# Altium PCB pay-led-pcb.PcbDoc
Units mm, origin at the board's own origin, x right, y up, seen from the top; angles counter-clockwise.
Board outline 128 x 17 mm, 4 copper layers (Top copper, GND, VCC, Bottom copper), stack 0.844 mm thick; 65 components, 63 nets, 221 pads, 139 vias.
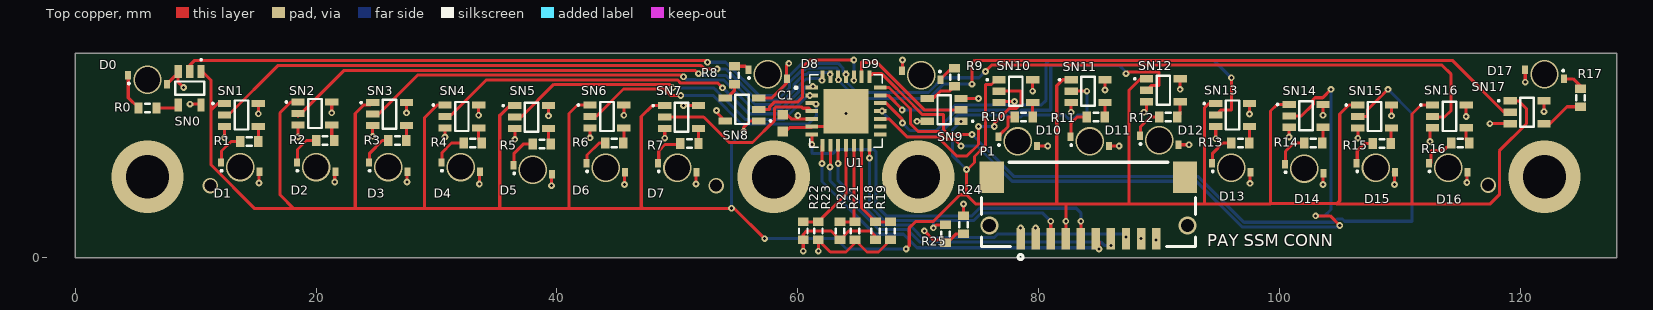
[diagram p0: Top copper view]
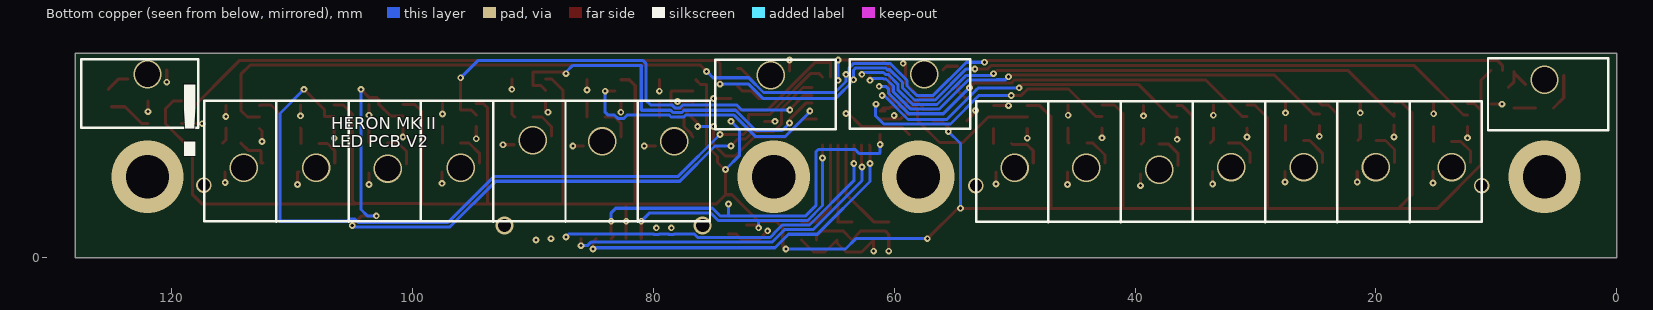
[diagram p1: Bottom copper view, seen from below]
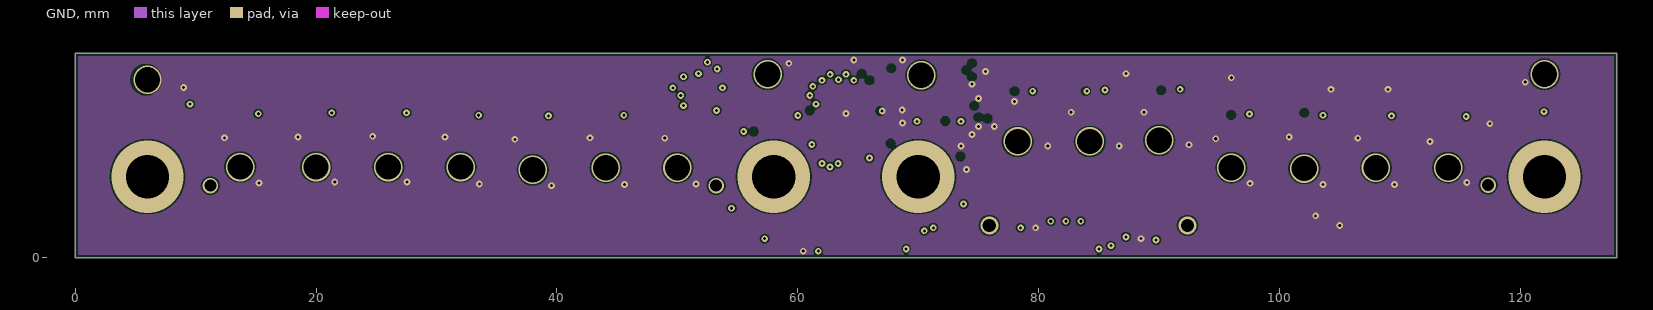
[diagram p2: GND]
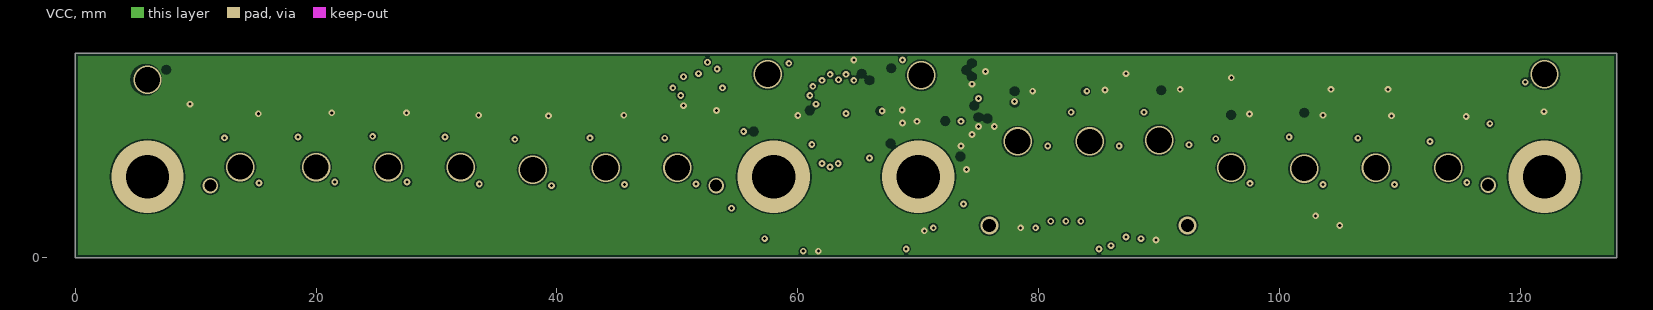
[diagram p3: VCC]

## Layer stack, top to bottom
Top Solder: solder mask 0.0102, Solder Resist, Dk 3.5
Top copper: signal copper 0.0356
Dielectric 1: core 0.32, FR-4, Dk 4.8
GND: signal copper 0.036
Dielectric 3: prepreg 0.127, Dk 4.2
VCC: signal copper 0.036
Dielectric 4: core 0.254, Dk 4.2
Bottom copper: signal copper 0.0356
Bottom Solder: solder mask 0.0102, Solder Resist, Dk 3.5

## Board outline
0,17 128,17 128,0 0,0

## Design rules (kind name [scope] priority, off if disabled: settings)
AssemblyTestPointUsage [All] p1 off:
AssemblyTestpoint [All] p1 off: testpointundercomponent=TRUE minsize=1.016 maxsize=2.54 preferedsize=1.524 minholesize=0 maxholesize=1.016 preferedholesize=0.813 testpointgrid=0.025 usegrid=TRUE gridtolerance=0 allowsidetop=TRUE allowsidebottom=TRUE
BoardOutlineClearance [OnLayer('VCC') or OnLayer('GND')] p1: gap=0.381 ignorepadtopadclearanceinfootprint=FALSE // Inner layer clearance
BoardOutlineClearance BoardOutlineClearance_1 [All] p2: gap=0.254 ignorepadtopadclearanceinfootprint=FALSE // top and bottom layers
Clearance [All] p1: gap=0.127 ignorepadtopadclearanceinfootprint=FALSE except(0: Arc-Hole Track-Hole SMDPad-Hole THPad-Hole Via-Hole Fill-Hole Poly-Hole Region-Hole Text-Hole)
FabricationTestPointUsage [All] p1 off: valid=0 allowmultiple=FALSE
FabricationTestpoint [All] p1 off: side=3 testpointundercomponent=FALSE minsize=1.016 maxsize=2.54 preferedsize=1.524 minholesize=0 maxholesize=1.016 preferedholesize=0.813 testpointgrid=0.025 allowsidetop=TRUE allowsidebottom=TRUE usegrid=TRUE gridtolerance=0
HoleSize [All] p1: absolutevalues=TRUE maxlimit=6.35 minlimit=0.203 maxpercent=80.000 minpercent=20.000
MinimumAnnularRing [All] p1: minimumring=0.127
MinimumSolderMaskSliver [All] p1: minsoldermaskwidth=0.102
PlaneConnect [All] p1: planeconnectstyle=Direct reliefexpansion=0.508 reliefentries=4 reliefconductorwidth=0.254 reliefairgap=0.254
PolygonConnect [All] p1: connectstyle=Direct reliefconductorwidth=0.254 reliefentries=4 polygonreliefangle="90 Angle" airgapwidth=0.254
RoomDefinition pay-led-pcb [InComponentClass('pay-led-pcb')] p1: confinementstyle=ConfineIn formatcopy=TRUE lockcomponents=FALSE outline 129,2 135.5,2 135.5,9.5 129,9.5
RoutingVias [All] p1: holewidth=0.254 width=0.559 viastyle="Through Hole" minholewidth=0.254 minwidth=0.559 maxholewidth=12.7 maxwidth=12.7
SilkToSilkClearance [All] p1: silktosilkclearance=0
SilkToSolderMaskClearance [IsPad] p1: minsilkscreentomaskgap=0.076 clearancetoexposedcopper=TRUE
SolderMaskExpansion [All] p1: expansion=0.102
Width [All] p1: maxlimit=254 minlimit=0.152 preferedwidth=0.254
21 further rules are at their usual default settings.

## Components (designator, comment, footprint, x,y, rotation, side; value= is the part's Value field where it differs from the comment)
C1 "0.1uF" 1608[0603] 58.75,11.2 r90 top
D0 "LED0" "LB P4SG" 6,14.792 r0 bottom
D1 "LED0" "LB P4SG" 13.7,7.55 r0 bottom
D2 "LED0" "LB P4SG" 20,7.55 r0 bottom
D3 "LED0" "LB P4SG" 26,7.55 r0 bottom
D4 "LED0" "LB P4SG" 32,7.55 r0 bottom
D5 "LED0" "LB P4SG" 38,7.325 r0 bottom
D6 "LED0" "LB P4SG" 44.05,7.5 r0 bottom
D7 "LED0" "LB P4SG" 50,7.5 r0 bottom
D8 "LED0" "LB P4SG" 57.5,15.25 r0 bottom
D9 "LED0" "LB P4SG" 70.25,15.167 r180 bottom
D10 "LED0" "LB P4SG" 78.25,9.675 r0 bottom
D11 "LED0" "LB P4SG" 84.25,9.675 r0 bottom
D12 "LED0" "LB P4SG" 90,9.775 r0 bottom
D13 "LED0" "LB P4SG" 96,7.5 r0 bottom
D14 "LED0" "LB P4SG" 102.05,7.425 r0 bottom
D15 "LED0" "LB P4SG" 108,7.5 r0 bottom
D16 "LED0" "LB P4SG" 114,7.5 r0 bottom
D17 "LED0" "LB P4SG" 122,15.25 r180 bottom
P1 "10 pin DF14" DF14-10P-1.25H(55) 84.125,1.6 r0 top locked
R0 "330" J1-0603 6,12.45 r0 top
R1 "330" J1-0603 14.45,9.675 r0 top
R2 "330" J1-0603 20.75,9.75 r0 top
R3 "330" J1-0603 26.75,9.75 r0 top
R4 "330" J1-0603 33,9.55 r0 top
R5 "330" J1-0603 38.75,9.45 r0 top
R6 "330" J1-0603 44.75,9.55 r0 top
R7 "330" J1-0603 51,9.5 r0 top
R8 "330" J1-0603 54.75,15.167 r270 top
R9 "330" J1-0603 73,15 r270 top
R10 "330" J1-0603 78.75,11.7 r0 top
R11 "330" J1-0603 84.75,11.7 r0 top
R12 "330" J1-0603 90.75,11.7 r0 top
R13 "330" J1-0603 96.75,9.55 r0 top
R14 "330" J1-0603 102.8,9.55 r0 top
R15 "330" J1-0603 108.5,9.5 r0 top
R16 "330" J1-0603 115,9.55 r0 top
R17 "330" J1-0603 125,13.306 r270 top
R18 "1K" J1-0603 66.45,2.25 r90 top
R19 "1K" J1-0603 67.7,2.25 r90 top
R20 "1K" J1-0603 63.5,2.25 r90 top
R21 "1K" J1-0603 64.75,2.25 r90 top
R22 "1K" J1-0603 60.45,2.25 r90 top
R23 "1K" J1-0603 61.7,2.25 r90 top
R24 "10K" J1-0603 73.75,2.75 r90 top
R25 "10K" J1-0603 72.25,2 r90 top
SN0 "SN74AHC1G08" SOT-23-5_95P290X160-5N 10.45,15.492 r270 top
SN1 "SN74AHC1G08" SOT-23-5_95P290X160-5N 12.4,12.825 r0 top
SN2 "SN74AHC1G08" SOT-23-5_95P290X160-5N 18.5,12.95 r0 top
SN3 "SN74AHC1G08" SOT-23-5_95P290X160-5N 24.7,12.9 r0 top
SN4 "SN74AHC1G08" SOT-23-5_95P290X160-5N 30.7,12.7 r0 top
SN5 "SN74AHC1G08" SOT-23-5_95P290X160-5N 36.5,12.65 r0 top
SN6 "SN74AHC1G08" SOT-23-5_95P290X160-5N 42.75,12.7 r0 top
SN7 "SN74AHC1G08" SOT-23-5_95P290X160-5N 48.95,12.65 r0 top
SN8 "SN74AHC1G08" SOT-23-5_95P290X160-5N 56.764,11.38 r180 top
SN9 "SN74AHC1G08" SOT-23-5_95P290X160-5N 73.55,11.35 r180 top
SN10 "SN74AHC1G08" SOT-23-5_95P290X160-5N 76.7,14.8 r0 top
SN11 "SN74AHC1G08" SOT-23-5_95P290X160-5N 82.7,14.8 r0 top
SN12 "SN74AHC1G08" SOT-23-5_95P290X160-5N 88.95,14.875 r0 top
SN13 "SN74AHC1G08" SOT-23-5_95P290X160-5N 94.7,12.825 r0 top
SN14 "SN74AHC1G08" SOT-23-5_95P290X160-5N 100.8,12.75 r0 top
SN15 "SN74AHC1G08" SOT-23-5_95P290X160-5N 106.5,12.7 r0 top
SN16 "SN74AHC1G08" SOT-23-5_95P290X160-5N 112.7,12.706 r0 top
SN17 "SN74AHC1G08" SOT-23-5_95P290X160-5N 119.162,13.052 r0 top
U1 "MCP23S17" QFN65P600X600X100-29N 64,12.2 r0 top

## Footprints (in the part's own frame and the unit in brackets; to place one, negate y for a bottom-side part, rotate by r counter-clockwise, add the part's x,y. Pads: shape width x height; smd on the part's side, far side on the other; paste and mask are expansions set on the pad)
1608[0603] [mm] "Chip Capacitor, Body 1.6x0.8mm, IPC High Density"
  rect 0.8x0.9 smd: 1(-0.7,0) 2(0.7,0)
  body extent -0.87,-0.48 0.87,0.48, height 1.3
DF14-10P-1.25H(55) [mm]
  rect 0.7x1.8 smd: 1(-5.625,0) 2(-4.375,0) 3(-3.125,0) 4(-1.875,0) 5(-0.625,0) 6(0.625,0) 7(1.875,0) 8(3.125,0) 9(4.375,0) 10(5.625,0)
  rect 2x2.6 smd: ""(-8.025,5.1) ""(8.025,5.1)
  silkscreen extent -8.89,-1.73 8.89,6.35, body extent -8.73,-0.5 8.72,6.2, height 2.49
J1-0603 [mm] "Chip Resistor, Body 1.6x0.8mm, IPC High Density"
  rect 0.7x0.9 smd: 1(-0.75,0) 2(0.75,0)
  silkscreen extent -0.2,-0.35 0.2,0.35, body extent -0.85,-0.48 0.85,0.48, height 0.9
"LB P4SG" [mm] "Footprint for a reverse-mount Osram LED"
  rect 0.5x0.7 smd far side mask+0.102: 1(-1.6,-0.375) 2(1.6,0.375)
QFN65P600X600X100-29N [mm]
  rect 1.04x0.33 smd: 1(-2.835,1.95) 2(-2.835,1.3) 3(-2.835,0.65) 4(-2.835,0) 5(-2.835,-0.65) 6(-2.835,-1.3) 7(-2.835,-1.95) 15(2.835,-1.95) 16(2.835,-1.3) 17(2.835,-0.65) 18(2.835,0) 19(2.835,0.65) 20(2.835,1.3) 21(2.835,1.95)
  rect 0.33x1.04 smd: 8(-1.95,-2.835) 9(-1.3,-2.835) 10(-0.65,-2.835) 11(0,-2.835) 12(0.65,-2.835) 13(1.3,-2.835) 14(1.95,-2.835) 22(1.95,2.835) 23(1.3,2.835) 24(0.65,2.835) 25(0,2.835) 26(-0.65,2.835) 27(-1.3,2.835) 28(-1.95,2.835)
  rect 3.7x3.7 smd: 29(0,0)
  silkscreen extent -4.24,-3 3,3
SOT-23-5_95P290X160-5N [mm]
  rect 1.1x0.6 smd: 1(0,0) 2(0,-0.95) 3(0,-1.9) 4(2.8,-1.9) 5(2.8,0)
  silkscreen extent -0.99,-2.16 1.96,0.25

## Part data
C1: library part Cap, "Capacitor", Supplier Part Number 1=311-1341-1-ND, LatestRevisionDate=17-Jul-2002, LatestRevisionNote="Re-released for DXP Platform.", PackageDescription="Radial Cap, Thru-Hole; 2 Leads; 0.3 in Pin Spacing", PackageReference=RAD-0.3, Published=8-Jun-2000, Publisher="Altium Limited", Supplier=Digi-Key
D0 D1 D2 D3 D4 D5 D6 D7 D8 D9 D10 D11 D12 D13 D14 D15 D16 D17: "Typical INFRARED GaAs LED", Supplier Part Number 1=475-1316-1-ND, LatestRevisionDate=08-Jul-2005, LatestRevisionNote="Mech Layer 1 removed.", PackageDescription="LED; 2 Leads", PackageReference=LED-0, Published=8-Jun-2000, Publisher="Altium Limited", Supplier=Digi-Key
P1: library part "Header 10", "Header, 10-Pin", Supplier Part Number 1=H10329CT-ND, LatestRevisionDate=17-Jul-2002, LatestRevisionNote="Re-released for DXP Platform.", Publisher="Altium Limited", Supplier=Digi-Key
R0 R1 R2 R3 R4 R5 R6 R7 R8 R9 R10 R11 R12 R13 R14 R15 R16 R17: library part Res2, "Resistor", Supplier Part Number 1=1276-4604-1-ND, LatestRevisionDate=17-Jul-2002, LatestRevisionNote="Re-released for DXP Platform.", PackageDescription="Axial Device, Thru-Hole; 2 Leads; 0.4 in Pin Spacing", PackageReference=AXIAL-0.4, Published=8-Jun-2000, Publisher="Altium Limited", Supplier=Digi-Key
R18 R19 R20 R21 R22 R23: library part Res2, "Resistor", Supplier Part Number 1=RNCP0603FTD1K00CT-ND, LatestRevisionDate=17-Jul-2002, LatestRevisionNote="Re-released for DXP Platform.", PackageDescription="Axial Device, Thru-Hole; 2 Leads; 0.4 in Pin Spacing", PackageReference=AXIAL-0.4, Published=8-Jun-2000, Publisher="Altium Limited", Supplier=Digi-Key
R24 R25: library part Res2, "Resistor", Supplier Part Number 1=RMCF0603JG10K0CT-ND, LatestRevisionDate=17-Jul-2002, LatestRevisionNote="Re-released for DXP Platform.", PackageDescription="Axial Device, Thru-Hole; 2 Leads; 0.4 in Pin Spacing", PackageReference=AXIAL-0.4, Published=8-Jun-2000, Publisher="Altium Limited", Supplier=Digi-Key
SN0 SN1 SN2 SN3 SN4 SN5 SN6 SN7 SN8 SN9 SN10 SN11 SN12 SN13 SN14 SN15 SN16 SN17: Supplier Part Number 1=296-23875-1-ND, Supplier=Digi-Key
U1: "16-bit I/O expander.", Supplier Part Number 1=MCP23S17T-E/MLCT-ND, Supplier=Digi-Key

## Via types
v1: diameter 0.559, hole 0.254, Top copper to Bottom copper, 111 vias
v2: diameter 2.362, hole 2.1, Top copper to Bottom copper, 18 vias
v3: diameter 6, hole 3.6, Top copper to Bottom copper, 4 vias
v4: diameter 1.3, hole 1, Top copper to Bottom copper, 3 vias
v5: diameter 1.5, hole 1.1, Top copper to Bottom copper, 2 vias
v6: diameter 0.559, hole 0.254, Top copper to GND, 1 vias

## Nets (pads, with @x,y where several pads share a name; then routed paths per layer and width w, separated by ;. In a path a pad name is that pad's centre, name@x,y a point inside that pad or via, vN(x,y) a via of type N, cw(c..) or ccw(c..) an arc to the next point about the centre after c; other vN are vias at no path point)
3V3: C1.2 P1.1 P1.10 R19.1 R21.1 R23.1 R24.1 R25.1 SN0.5 SN1.5 SN2.5 SN3.5 SN4.5 SN5.5 SN6.5 SN7.5 SN8.5 SN9.5 SN10.5 SN11.5 SN12.5 SN13.5 SN14.5 SN15.5 SN16.5 SN17.5 U1.5 | length 31.9
  Top copper w0.254: v1(9.525,12.775) SN0.5@10.45,12.775 ; v1(15.2,11.975) SN1.5 ; v1(21.3,12.05) SN2.5 ; v1(27.5,12.05) SN3.5 ; v1(33.5,11.85) SN4.5 ; v1(39.3,11.8) SN5.5 ; v1(45.55,11.85) SN6.5 ; v1(50.5,12.65) SN7.5 ; v1(53.25,12.25) 53.25,12.094 SN8.5 ; C1.2 59.1,11.9 59.45,11.55 v1@60,11.55 ; v1(60,11.829) v1@60,11.55 ; U1.5 v1@60,11.55 ; v1(61.7,0.562) R23.1 62.7,0.5 64,0.5 64.75,1.25 R21.1 65.75,0.5 66.7,0.5 R19.1 ; v1(69.9,11.35) SN9.5 ; v1(70.5,2.25) 71.25,1.5 72.65,1.5 73.15,2 R24.1 ; v1(79.5,13.85) SN10.5 ; v1(85.5,13.942) SN11.5 ; v1(89.75,1.5) P1.10 ; v1(91.75,14) SN12.5 ; v1(97.5,11.95) SN13.5 ; v1(103.6,11.85) SN14.5 ; v1(109.3,11.8) SN15.5 ; v1(115.5,11.75) SN16.5@115.5,12.65 ; v1(121.962,12.153) SN17.5
  other v1: 78.5,2.5
CH0: SN0.2 SN16.2 U1.25 | length 115.5
  Top copper w0.254: SN0.2@9.5,15.575 9.5,16 9.875,16.375 9.869,16.381 52.369,16.381 v1(52.5,16.25) ; v1(75.575,15.492) 75.575,15.502 76.099,16.026 113.474,16.026 114.25,15.25 114.25,12.25 113.7,11.7 SN16.2@112.7,11.7
  Bottom copper w0.254: v1(52.5,16.25) 54.002,16.25 56.752,13.5 58.15,13.5 58.935,14.285 58.935,14.746 60.353,16.164 63.349,16.164 63.756,15.758 63.756,15.494 v1(64,15.25) 64,14.646 64.913,13.732 70.844,13.732 72.076,14.964 75.047,14.964 v1(75.575,15.492)
CH1: SN1.2 SN17.2 U1.26 | length 116.6
  Top copper w0.254: SN1.2 12.725,11.875 16.85,16 51.931,16 52.23,15.701 v1(53.299,15.701) ; U1.26 63.375,15.06 v1(63.375,14.8) ; v1(74.457,14.431) 74.457,16.164 74.7,16.407 114.343,16.407 SN17.2@118.75,12
  Bottom copper w0.254: v1(53.299,15.701) 54.012,15.701 56.594,13.119 58.308,13.119 59.316,14.127 59.316,14.589 60.358,15.631 60.574,15.631 60.726,15.783 63.192,15.783 63.375,15.6 v1(63.375,14.8) 63.375,14.732 64.857,13.25 70.901,13.25 72.082,14.431 v1(74.457,14.431)
CH2: SN2.2 U1.27 | length 48.9
  Top copper w0.254: SN2.2 18.5,11.741 19.304,12.545 19.304,12.554 22.333,15.583 51.467,15.583 v1(51.75,15.3) ; v1(62.689,15.25) 62.689,15.024 U1.27
  Bottom copper w0.254: v1(51.75,15.3) 51.883,15.167 54.007,15.167 56.436,12.738 58.466,12.738 59.697,13.969 59.697,14.431 60.516,15.25 60.732,15.25 60.884,15.402 62.537,15.402 v1(62.689,15.25)
CH3: SN3.2 U1.28 | length 41.6
  Top copper w0.254: SN3.2 25.2,11.95 28.425,15.175 50.375,15.175 v1(50.5,15.05) ; v1(62,14.75) 62,15.085 U1.28
  Bottom copper w0.254: v1(50.5,15.05) 50.75,14.8 51.496,14.8 51.529,14.767 53.869,14.767 56.278,12.357 58.623,12.357 60.078,13.812 60.078,14.273 60.674,14.869 60.89,14.869 60.923,14.902 61.848,14.902 v1(62,14.75)
CH4: SN4.2 U1.1 | length 34.1
  Top copper w0.254: SN4.2 31.1,11.75 34.144,14.794 50.002,14.794 50.279,14.517 53.364,14.517 v1(53.75,14.131)
  Bottom copper w0.254: v1(53.75,14.131) 53.771,14.131 55.927,11.975 58.419,11.975 58.42,11.976 58.781,11.976 60.459,13.654 60.459,14.015 60.694,14.25 v1(61.25,14.25)
CH5: SN5.2 U1.2 | length 27.8
  Top copper w0.254: SN5.2 37.025,11.7 39.738,14.413 49.337,14.413 v1(49.619,14.131) ; v1(61,13.5) U1.2
  Bottom copper w0.254: v1(49.619,14.131) 53,14.131 53.217,13.914 53.217,13.91 55.627,11.5 58.844,11.5 60.811,13.467 60.967,13.467 v1(61,13.5)
CH6: SN6.2 U1.3 | length 22.2
  Top copper w0.254: SN6.2 43.25,11.75 45.532,14.032 48.918,14.032 49.45,13.5 v1(50.279,13.5)
  Bottom copper w0.254: v1(50.279,13.5) 52.949,13.5 55.33,11.119 60.869,11.119 61.533,11.784 61.533,12.742 v1(61.5,12.775)
CH7: SN7.2 U1.4 | length 15.5
  Top copper w0.254: SN7.2 52.181,11.7 54.295,9.586 56.234,9.586 58.046,11.398 58.046,12.405 58.195,12.554 60.294,12.554 60.417,12.431 60.934,12.431 U1.4 U1.4@60.771,12.2
CH8: SN8.2 U1.24 | length 13.2
  Top copper w0.254: SN8.2 57.665,12.33 57.665,12.563 58.037,12.935 59.979,12.935 60.391,13.347 60.391,15.837 61,16.446 v1(64.65,16.446) ; v1(64.65,14.75) U1.24
  Bottom copper w0.254: v1(64.65,14.75) v1(64.65,16.446)
CH9: SN9.2 U1.23 | length 11.1
  Top copper w0.254: U1.23 65.3,16.25 66.55,16.25 69.946,12.854 69.946,12.845 70.491,12.3 SN9.2
CH10: SN10.2 U1.17 | length 19.1
  Top copper w0.254: U1.17@66.45,11.55 U1.17 67.609,11.55 67.609,11.52 69.079,10.05 71.607,10.05 73.179,8.478 74.053,8.478 75,9.425 v1(75,10.908) ; v1(76.316,10.908) 76.316,11.175 77.545,12.404 78.158,12.404 78.533,12.779 78.533,13.817 78.5,13.85 SN10.2
  Bottom copper w0.254: v1(75,10.908) v1(76.316,10.908)
CH11: SN11.2 U1.18 | length 21.9
  Top copper w0.254: U1.18 v1(67,12.2) ; SN11.2@83.2,13.85 v1(84,13.85)
  Bottom copper w0.254: v1(67,12.2) 67,12.129 69.029,10.1 71.546,10.1 73.329,11.883 77.285,11.883 77.463,11.705 78.537,11.705 78.715,11.883 82.167,11.883 82.167,11.879 82.479,11.567 82.921,11.567 83.233,11.879 83.233,11.883 83.783,11.883 84,12.1 v1(84,13.85)
CH12: SN12.2 U1.19 | length 31.6
  Top copper w0.254: U1.19 67.346,12.85 68.667,11.529 68.667,11.217 v1(68.683,11.2) ; v1(87.25,15.3) 87.379,15.429 90,15.429 90,14.321 89.346,14.321 SN12.2
  Bottom copper w0.254: v1(68.683,11.2) 69.299,10.584 71.491,10.584 73.171,12.264 77.442,12.264 77.621,12.086 78.379,12.086 78.558,12.264 80.981,12.264 81,12.283 81,16 86.685,16 87.25,15.435 v1(87.25,15.3)
CH13: SN13.2 U1.20 | length 38.1
  Top copper w0.254: U1.20 67.497,13.5 68.667,12.33 v1(68.667,12.283) ; SN13.2 95.096,12.271 96,12.271 v1(96,14.964)
  Bottom copper w0.254: v1(68.667,12.283) 72.651,12.283 73.085,12.717 77.529,12.717 77.779,12.467 78.221,12.467 78.471,12.717 80.233,12.717 80.619,13.102 80.619,16.158 80.842,16.381 94.569,16.381 95.986,14.964 v1(96,14.964)
CH14: SN14.2 U1.21 | length 62.3
  Top copper w0.254: U1.21 67.572,14.15 69.184,12.538 69.184,12.529 69.367,12.347 69.367,11.129 69.996,10.5 71.696,10.5 72.196,10 72.219,10 72.346,9.873 72.977,9.873 v1(73.55,9.3) v1@73.65,9.4 ; SN14.2 101.83,11.8 102.796,12.766 102.796,13.155 102.945,13.304 103.581,13.304 v1(104.277,14) ; v1(103,3.5) 104.2,3.5 v1(105,2.7)
  Bottom copper w0.254: v1(73.55,9.3) 74.872,9.3 77.803,6.369 93.092,6.369 96.876,2.586 104.886,2.586 v1(105,2.7) ; v1(103,3.5) 103.75,3.5 104.277,4.027 v1(104.277,14)
CH15: SN15.2 U1.22 | length 66.7
  Top copper w0.254: U1.22 66.215,15.3 66.961,15.3 69.565,12.696 69.565,12.687 70.348,11.904 72.096,11.904 72.096,10.662 72.504,10.254 v1(74.457,10.254) ; SN15.2 107.304,11.75 107.304,12.304 v1(109,14)
  Bottom copper w0.254: v1(74.457,10.254) 77.961,6.75 93.25,6.75 97.033,2.967 104.512,2.967 104.779,3.233 105.221,3.233 105.404,3.05 111,3.05 111,12 v1(109,14)
GND: C1.1 D0.2 D1.2 D2.2 D3.2 D4.2 D5.2 D6.2 D7.2 D8.2 D9.2 D10.2 D11.2 D12.2 D13.2 D14.2 D15.2 D16.2 D17.2 P1.2 P1.9 R18.1 R20.1 R22.1 SN0.3 SN1.3 SN2.3 SN3.3 SN4.3 SN5.3 SN6.3 SN7.3 SN8.3 SN9.3 SN10.3 SN11.3 SN12.3 SN13.3 SN14.3 SN15.3 SN16.3 SN17.3 U1.6 U1.29 | length 54.3
  Top copper w0.254: D0.2 SN0.3@8.55,15.367 ; D0.2@7.6,14.425 8,14.825 ; SN0.3 SN0.3@8.55,15.367 ; v6(9,14.15) 8.55,14.6 SN0.3@8.55,15.367 ; v1(12.4,9.975) SN1.3 ; v1(15.25,6.225) D1.2@15.25,7.175 ; v1(18.5,10.05) SN2.3 ; v1(21.55,6.3) D2.2@21.55,7.175 ; v1(24.7,10.1) SN3.3 ; v1(27.55,6.3) D3.2@27.55,7.175 ; v1(30.7,10.05) SN4.3 ; v1(33.55,6.15) D4.2@33.55,7.175 ; v1(36.5,9.85) SN5.3 ; v1(39.55,6) D5.2@39.55,6.95 ; v1(42.75,9.975) SN6.3 ; v1(45.6,6.1) D6.2@45.6,7.125 ; v1(48.95,9.95) SN7.3 ; v1(51.55,6.15) D7.2@51.55,7.125 ; SN8.3 57.841,13.28 59.05,14.489 59.05,15.964 v1(59.25,16.164) ; C1.1@58.75,10.25 59.35,10.85 61.115,10.85 U1.6 62.7,10.9 U1.29 v1(64,12) ; v1(60.45,0.561) R22.1 60.45,1.95 60.75,2.25 62.75,2.25 R20.1 64.25,2.25 66,2.25 66.45,1.8 R18.1 ; D9.2@68.7,15.542 v1(68.7,16.446) ; SN9.3 v1(75,13.25) ; SN10.3 76.8,13 v1(78,13) ; D10.2@79.8,9.3 D10.2 v1(80.75,9.3) ; v1(82.7,12.1) SN11.3 ; D11.2@85.8,9.3 D11.2 v1(86.685,9.3) ; v1(88.75,12.1) 88.95,12.3 SN12.3 ; D12.2@91.55,9.4 D12.2 v1(92.485,9.4) ; v1(94.7,9.9) SN13.3 ; v1(97.55,6.2) D13.2@97.55,7.125 ; v1(100.8,10.05) SN14.3 ; v1(103.6,6.1) D14.2@103.6,7.05 ; v1(106.5,9.95) SN15.3 ; D15.2@109.435,7.125 109.55,7.125 v1(109.55,6.1) ; v1(112.5,9.675) 112.5,10.55 SN16.3@112.7,10.75 ; v1(115.55,6.275) D16.2@115.55,7.125 ; v1(117.462,11.152) SN17.3 ; v1(120.4,14.6) D17.2
  other v1: 88.5,1.6 79.75,2.5
LED_CLK: P1.4 SN0.1 SN1.1 SN2.1 SN3.1 SN4.1 SN5.1 SN6.1 SN7.1 SN8.1 SN9.1 SN10.1 SN11.1 SN12.1 SN13.1 SN14.1 SN15.1 SN16.1 SN17.1 | length 278.1
  Top copper w0.254: SN0.1@10.45,15.575 11.288,14.737 11.288,12.287 ; SN1.1 11.825,12.825 11.288,12.287 ; SN2.1 17.9,12.95 17,12.05 17,5.25 18.154,4.096 ; 23.25,4.25 23.25,12 23.95,12.7 24.5,12.7 SN3.1 ; SN4.1 30.05,12.7 29,11.65 29,4.096 ; SN5.1 36.092,12.65 35.292,11.85 35.25,11.85 35.25,4.096 ; SN6.1 41.7,12.7 41,12 41,4.096 ; SN7.1 47.9,12.65 47,11.75 47,4.25 ; v1@54.5,4.096 47.154,4.096 47,4.25 ; v1@54.742,4.096 v1@57.244,1.594 ; v1(55.5,10.5) 55.5,10.85 56.03,11.38 SN8.1 ; v1(69,0.75) 69.25,1 69.25,2.5 69.783,3.033 71.245,3.033 73.461,5.25 74,5.25 ; v1@74,7.325 v1(74,7.352) ; v1@74.033,7.292 74,7.258 74,5.25 ; v1@74.047,7.305 74.675,7.933 74.675,8.425 75.575,9.325 75.575,14.404 76.076,14.404 SN10.1@76.472,14.8 ; P1.4 v1(82.25,3.05) 82.25,4.5 ; SN11.1 82,14.8 81.5,14.3 81.5,4.5 ; SN12.1 88.45,14.875 87.5,13.925 87.5,4.5 ; SN13.1 94.125,12.825 93.75,12.45 93.75,4.5 ; SN14.1 99.8,12.75 99.25,12.2 99.25,4.5 ; SN15.1 105.75,12.7 105,11.95 105,4.75 104.75,4.5 ; SN16.1@112.7,12.65 112.65,12.7 111.75,12.7 111,11.95 111,4.5 ; SN17.1 119.848,13.052 120.5,12.4 120.5,11.15 118.25,8.9 118.25,5.25 117.5,4.5 111,4.5 ; 11.288,12.287 11.288,7.712 14.904,4.096 18.154,4.096 ; 18.154,4.096 29,4.096 ; 29,4.096 35.25,4.096 ; 35.25,4.096 41,4.096 ; 41,4.096 47,4.096 47,4.25 ; 74,5.25 74.75,4.5 81.5,4.5 ; 81.5,4.5 82.25,4.5 ; 82.25,4.5 87.5,4.5 ; 87.5,4.5 93.75,4.5 ; 93.75,4.5 99.25,4.5 ; 99.25,4.5 99.283,4.533 104.717,4.533 104.75,4.5 ; 104.75,4.5 111,4.5
  Bottom copper w0.254: v1(54.5,4.131) 54.5,9.5 v1(55.5,10.5) ; v1(57.25,1.6) 63.187,1.6 64.037,0.75 v1(69,0.75) ; v1(73.55,11.35) 72.83,10.63 72.83,8.522 v1(74,7.352)
MISO: P1.8 U1.10 | length 29.3
  Top copper w0.254: v1(63.35,7.85) U1.10 ; P1.8 v1(87.25,1.75)
  Bottom copper w0.254: v1(63.35,7.85) 63.35,6.412 67.028,2.734 69.299,2.734 69.967,2.067 69.967,2.029 70.3,1.696 76.316,1.696 76.62,2 78.246,2 78.279,1.967 78.721,1.967 78.754,2 79.496,2 79.529,1.967 79.971,1.967 80.004,2 87,2 v1(87.25,1.75)
MOSI: P1.7 U1.9 | length 29.1
  Top copper w0.254: v1(62.675,7.555) 62.7,7.58 U1.9 ; v1(86,1.021) P1.7
  Bottom copper w0.254: v1(62.675,7.555) 62.675,6.425 66.747,2.353 69.104,2.353 70.142,1.315 85.189,1.315 85.483,1.021 v1(86,1.021)
NetD0_1: D0.1 R0.1 | length 3.1
  Top copper w0.254: D0.1 4.4,13.3 R0.1
NetD1_1: D1.1 R1.1 | length 2.8
  Top copper w0.254: D1.1@12.15,7.925 12.15,8.875 12.95,9.675 R1.1
NetD2_1: D2.1 R2.1 | length 2.9
  Top copper w0.254: D2.1@18.45,7.925 18.45,9 19.2,9.75 R2.1
NetD3_1: D3.1 R3.1 | length 2.8
  Top copper w0.254: D3.1@24.45,7.925 24.45,8.7 25.5,9.75 R3.1
NetD4_1: D4.1 R4.1 | length 3
  Top copper w0.254: D4.1@30.45,7.925 30.45,8.75 31.25,9.55 R4.1
NetD5_1: D5.1 R5.1 | length 2.9
  Top copper w0.254: D5.1@36.45,7.7 36.45,8.7 37.2,9.45 R5.1
NetD6_1: D6.1 R6.1 | length 2.6
  Top copper w0.254: D6.1@42.5,7.875 42.5,8.55 43.5,9.55 R6.1
NetD7_1: D7.1 R7.1 | length 3.1
  Top copper w0.254: D7.1@48.45,7.875 48.45,8.9 48.967,9.417 50.167,9.417 R7.1
NetD8_1: D8.1 R8.1 | length 1.3
  Top copper w0.254: R8.1 55.658,15.917 D8.1@55.95,15.625
NetD9_1: D9.1 R9.1 | length 1.6
  Top copper w0.254: D9.1@71.8,14.792 72.758,15.75 R9.1
NetD10_1: D10.1 R10.1 | length 2.5
  Top copper w0.254: D10.1@76.7,10.05 76.815,10.165 76.815,10.269 77.45,10.905 77.45,11.7 R10.1
NetD11_1: D11.1 R11.1 | length 2.7
  Top copper w0.254: D11.1@82.7,10.05 82.7,11.2 83.2,11.7 R11.1
NetD12_1: D12.1 R12.1 | length 2.6
  Top copper w0.254: D12.1@88.45,10.15 88.45,10.9 89.25,11.7 R12.1
NetD13_1: D13.1 R13.1 | length 2.7
  Top copper w0.254: D13.1@94.45,7.875 94.45,8.7 95.3,9.55 R13.1
NetD14_1: D14.1 R14.1 | length 2.9
  Top copper w0.254: D14.1@100.5,7.8 100.5,8.85 101.2,9.55 R14.1
NetD15_1: D15.1 R15.1 | length 2.6
  Top copper w0.254: D15.1@106.45,7.875 106.45,8.9 107.05,9.5 R15.1
NetD16_1: D16.1 R16.1 | length 3.1
  Top copper w0.254: D16.1 112.565,7.875 112.565,8.819 112.68,8.935 113.635,8.935 R16.1
NetD17_1: D17.1 R17.1 | length 2
  Top copper w0.254: D17.1@123.625,14.875 124.375,14.875 R17.1@125.25,14
NetR0_2: R0.2 SN0.4 | length 1.8
  Top copper w0.254: R0.2 SN0.4@8.55,12.45
NetR1_2: R1.2 SN1.4 | length 1.2
  Top copper w0.254: R1.2 SN1.4
NetR2_2: R2.2 SN2.4 | length 1.4
  Top copper w0.254: SN2.4 21.3,9.95 R2.2
NetR3_2: R3.2 SN3.4 | length 1.2
  Top copper w0.254: R3.2 SN3.4
NetR4_2: R4.2 SN4.4 | length 1.4
  Top copper w0.254: SN4.4 33.5,9.8 R4.2
NetR5_2: R5.2 SN5.4 | length 1.4
  Top copper w0.254: SN5.4 39.3,9.65 R5.2
NetR6_2: R6.2 SN6.4 | length 1.3
  Top copper w0.254: R6.2 45.55,9.6 SN6.4
NetR7_2: R7.2 SN7.4 | length 1.2
  Top copper w0.254: R7.2 SN7.4
NetR8_2: R8.2 SN8.4 | length 1.9
  Top copper w0.254: SN8.4 54.105,13.28 54.75,13.925 R8.2 R8.2@54.5,14.167
NetR9_2: R9.2 SN9.4 | length 2.7
  Top copper w0.254: SN9.4 71.25,13.25 71.85,13.85 72.6,13.85 R9.2
NetR10_2: R10.2 SN10.4 | length 1.2
  Top copper w0.254: R10.2 SN10.4
NetR11_2: R11.2 SN11.4 | length 1.2
  Top copper w0.254: R11.2 SN11.4
NetR12_2: R12.2 SN12.4 | length 1.4
  Top copper w0.254: R12.2 91.75,11.95 SN12.4
NetR13_2: R13.2 SN13.4 | length 1.4
  Top copper w0.254: R13.2 SN13.4
NetR14_2: R14.2 SN14.4 | length 1.3
  Top copper w0.254: R14.2 103.6,9.6 SN14.4
NetR15_2: R15.2 SN15.4 | length 1.3
  Top copper w0.254: R15.2 109.25,10.75 SN15.4
NetR16_2: R16.2 SN16.4 | length 1.4
  Top copper w0.254: SN16.4 115.5,9.8 R16.2
NetR17_2: R17.2 SN17.4 | length 3.6
  Top copper w0.254: SN17.4 122.457,11.152 123.861,12.556 R17.2
NetR18_2: R18.2 R19.2 U1.13 | length 8.1
  Top copper w0.254: U1.13 65.3,4.15 R18.2 R19.2
NetR20_2: R20.2 R21.2 U1.12 | length 7.6
  Top copper w0.254: R20.2 64.7,3 64.65,3.05 U1.12
NetR22_2: R22.2 R23.2 U1.11 | length 8.6
  Top copper w0.254: R22.2 R23.2 64,5.3 U1.11
PEX_C\S\: P1.5 R24.2 U1.7 | length 33.6
  Top copper w0.254: v1(61.165,9.415) U1.7 ; R24.2@73.762,3.5 v1(73.762,4.488) ; P1.5 83.3,1.8 83.5,2 v1(83.5,3.05)
  Bottom copper w0.254: v1(61.165,9.415) 61.165,8.75 61.25,8.665 62.896,8.665 63.231,9 66.3,9 66.5,8.8 66.5,4.34 67.344,3.496 73.762,3.496 ; v1(73.762,4.488) 73.762,3.496 ; v1(83.5,3.05) 83.5,3.75 83.119,4.131 75.092,4.131 74.457,3.496 73.762,3.496
PEX_R\S\T\: P1.3 R25.2 U1.14 | length 24.3
  Top copper w0.254: v1(65.95,8.3) U1.14 ; v1(71.25,2.5) 71.5,2.75 R25.2 ; P1.3 v1(81,3.05)
  Bottom copper w0.254: v1(65.95,8.3) 65.95,4.351 67.186,3.115 71.25,3.115 ; v1(71.25,2.5) 71.25,3.115 ; v1(81,3.05) 80.3,3.75 75.25,3.75 74.615,3.115 71.25,3.115
SCK: P1.6 U1.8 | length 29.3
  Top copper w0.254: v1(62,7.85) 62,9.315 U1.8 ; P1.6 85,1.35 v1(85,0.75)
  Bottom copper w0.254: v1(62,7.85) 62,6.35 66.378,1.972 68.778,1.972 69.9,0.85 84.9,0.85 v1(85,0.75)
pads on no net: P1. U1.15 U1.16
copper on no net:
  other v2: 38,7.325 102.05,7.425 44.05,7.5 50,7.5 96,7.5 108,7.5 114,7.5 13.7,7.55 20,7.55 26,7.55 32,7.55 78.25,9.675 84.25,9.675 90,9.775 6,14.792 70.25,15.167 57.5,15.25 122,15.25
  other v3: 6,6.75 58,6.75 70,6.75 122,6.75
  other v4: 11.22,6 53.22,6 117.32,6.05
  other v5: 75.9,2.7 92.35,2.7

## Polygon pours and split planes (outlines as drawn)
GND on GND "Amplifier_GND" (solid, pour order 0): 0,0 0,17 128,17 128,0
3V3 on VCC "Amplifier_GND" (solid, pour order 2): 0,0.021 0,17.021 128,17.021 128,0.021

## Silkscreen, mask and mechanical layers (free items; w line width, h text height)
Top Overlay:
  text "PAY SSM CONN" at 94,0.965 h1
Bottom Overlay:
  lines w0.2: 17.195,2.95 17.195,12.95 ; 23.195,2.95 23.195,12.95 ; 29.195,2.95 29.195,12.95 ; 35.195,3.133 35.195,12.95 ; 41.195,2.95 41.195,12.95 ; 47.195,2.95 47.195,12.95 ; 81.295,3 81.295,13 ; 87.295,3 87.295,13 ; 93.295,3 93.295,13 ; 99.295,3.183 99.295,13 ; 105.295,3 105.295,13 ; 111.295,3 111.295,13 ; 0.692,10.589 10.692,10.589 10.692,16.589 0.692,16.589 0.692,10.589 ; 11.195,3 11.195,13 53.195,13 53.195,3 11.195,3 ; 53.692,10.719 63.692,10.719 63.692,16.5 53.692,16.5 53.692,10.719 ; 64.842,10.676 74.842,10.676 74.842,16.446 64.842,16.446 64.842,10.676 ; 75.295,3.05 75.295,13.05 117.295,13.05 117.295,3.05 75.295,3.05 ; 117.792,10.816 127.5,10.816 127.5,16.5 117.792,16.5 117.792,10.816
  text "HERON MK II / LED PCB V2" at 106.75,9.2 h1
  text "!" at 120.4,6.2 h12
Mechanical 1:
  circle w0.254: c122,15.5 r2.5
  circle w0.254: c26,7.5 r2.5
  circle w0.254: c20,7.5 r2.5
  circle w0.254: c6,15.5 r2.5
  circle w0.254: c114,7.5 r2.5
  circle w0.254: c108,7.5 r2.5
  circle w0.254: c102,7.5 r2.5
  circle w0.254: c96,7.5 r2.5
  circle w0.254: c90,7.5 r2.5
  circle w0.254: c84,7.625 r2.5
  circle w0.254: c78,7.5 r2.5
  circle w0.254: c70,15.5 r2.54
  circle w0.254: c58,15.5 r2.55
  circle w0.254: c50,7.5 r2.5
  circle w0.254: c44,7.5 r2.5
  circle w0.254: c38,7.5 r2.5
  circle w0.254: c32,7.5 r2.5
  circle w0.254: c13.75,7.5 r2.5
Route Tool Path:
  the board outline again, w0.2